# Altium PCB 10-Channel SPI Sensing Circuit.PcbDoc
Units mil, origin at the board's own origin, x right, y up, seen from the top; angles counter-clockwise.
Board outline 1023.62 x 1141.73 mil, 4 copper layers (Top Layer, GroundPlane, PowerPlane, Bottom Layer), stack 70.17 mil thick; 32 components, 41 nets, 191 pads, 54 vias.
Unrouted connection lines stored in the file: 1.
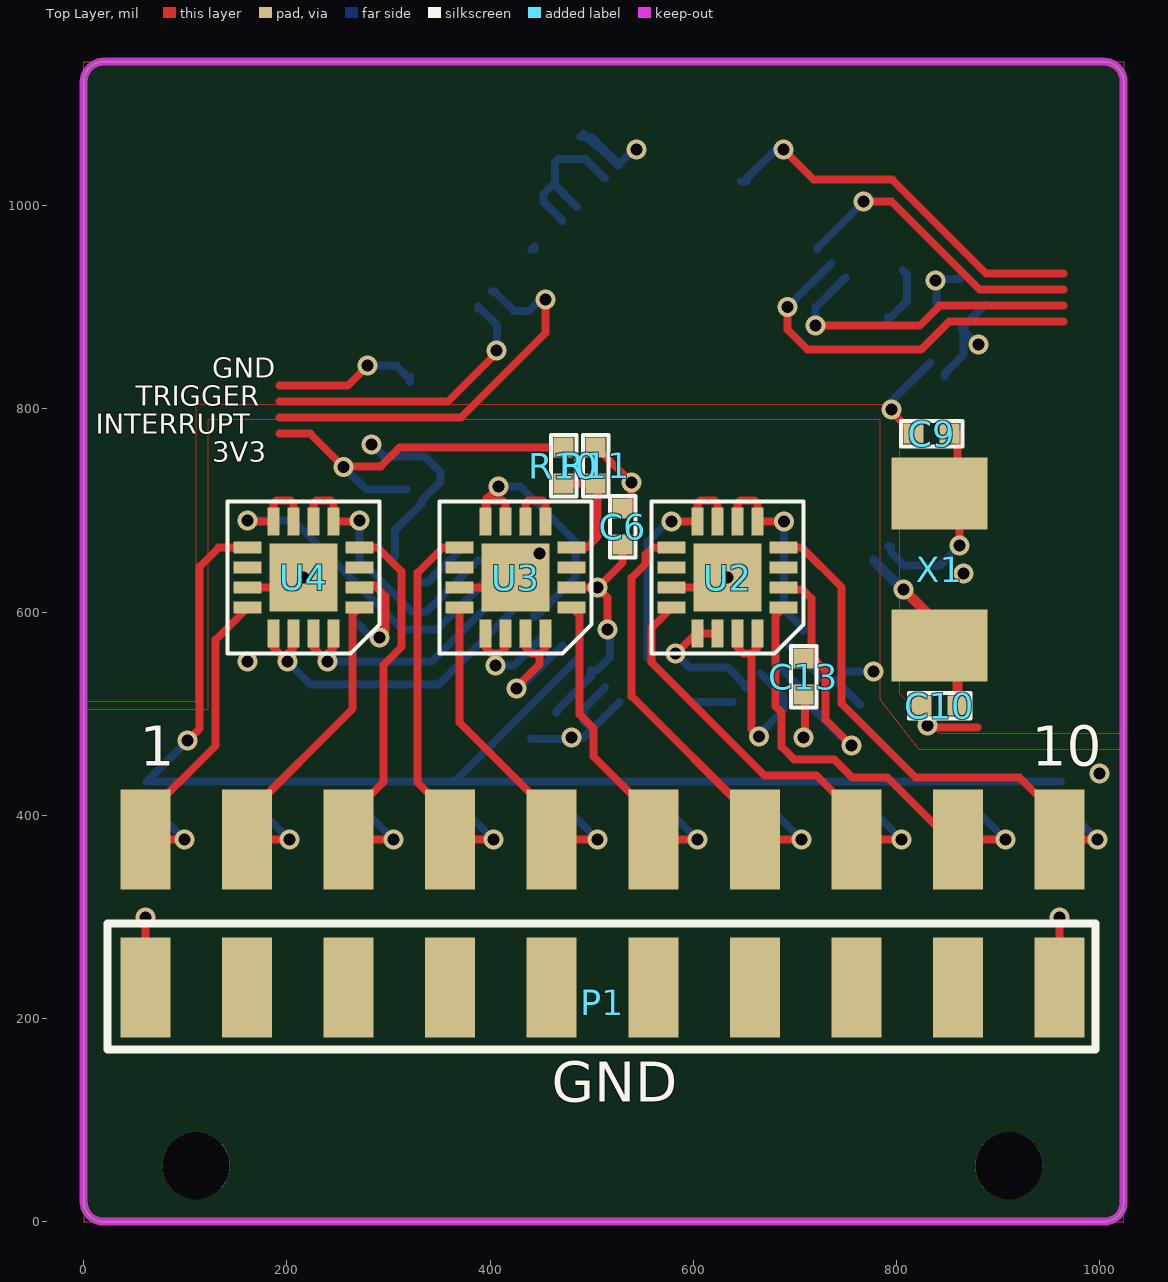
[diagram p0: Top Layer view]
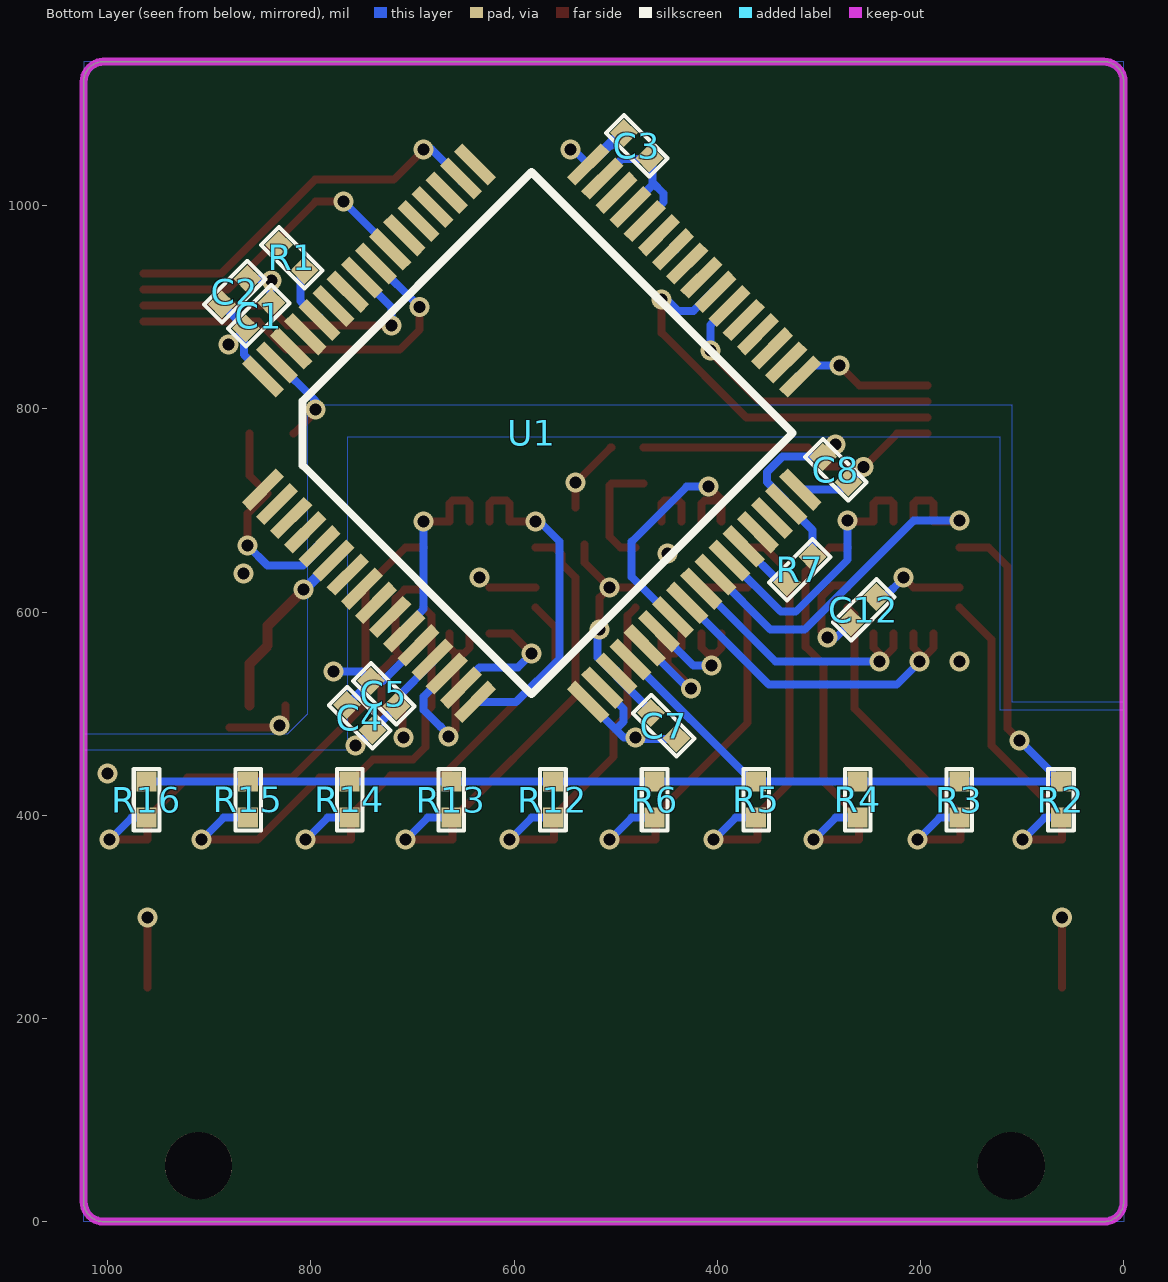
[diagram p1: Bottom Layer view, seen from below]
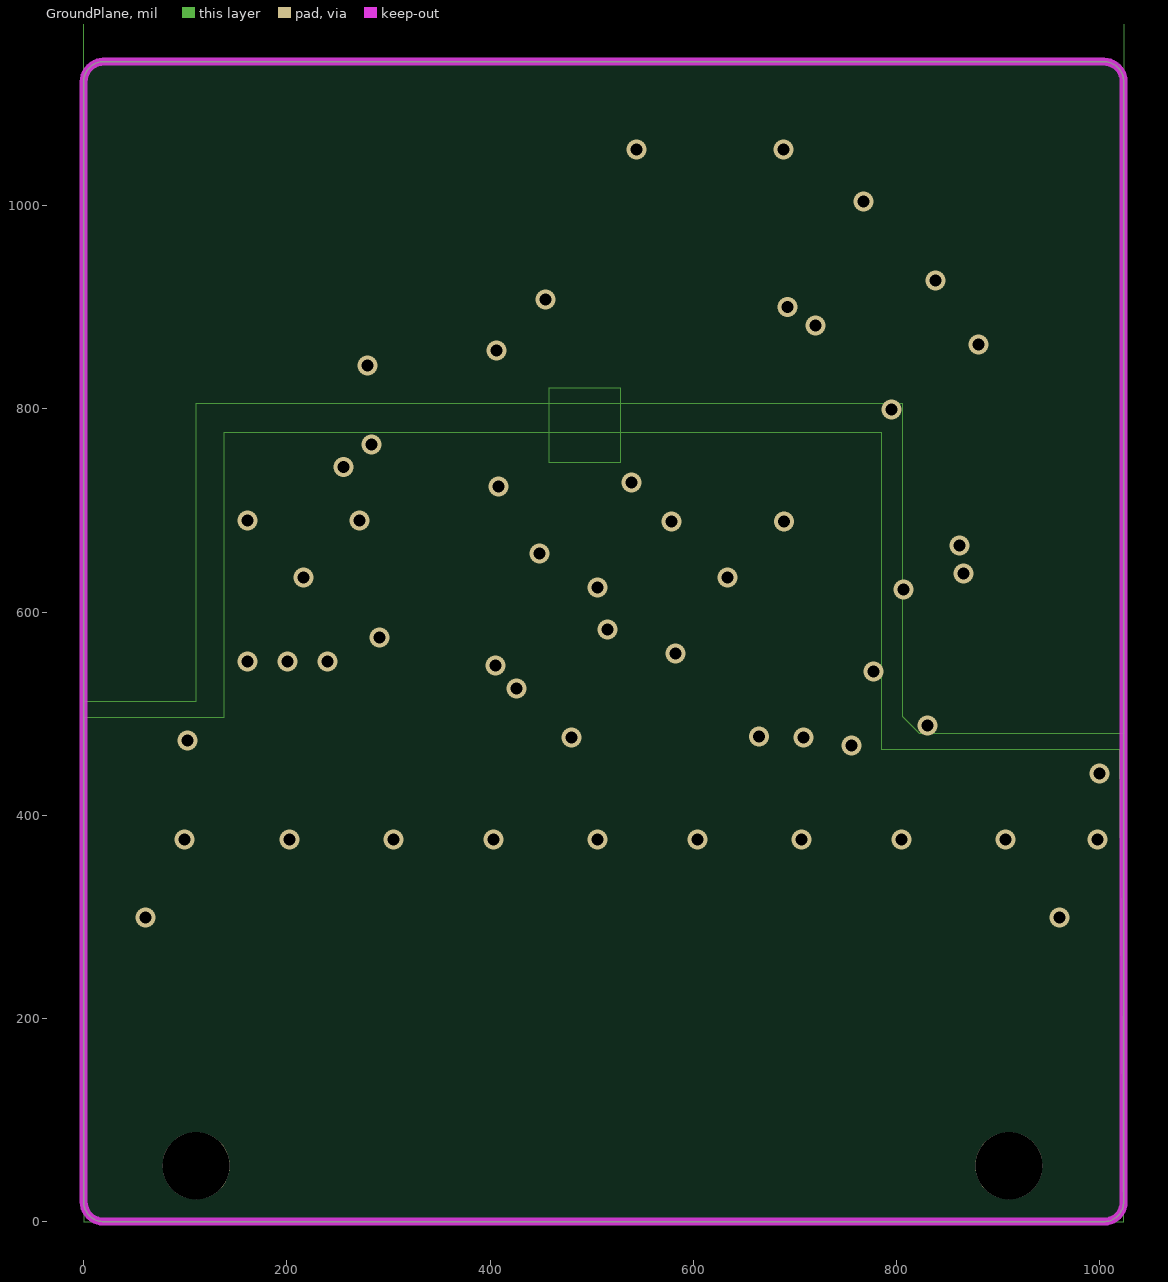
[diagram p2: GroundPlane]
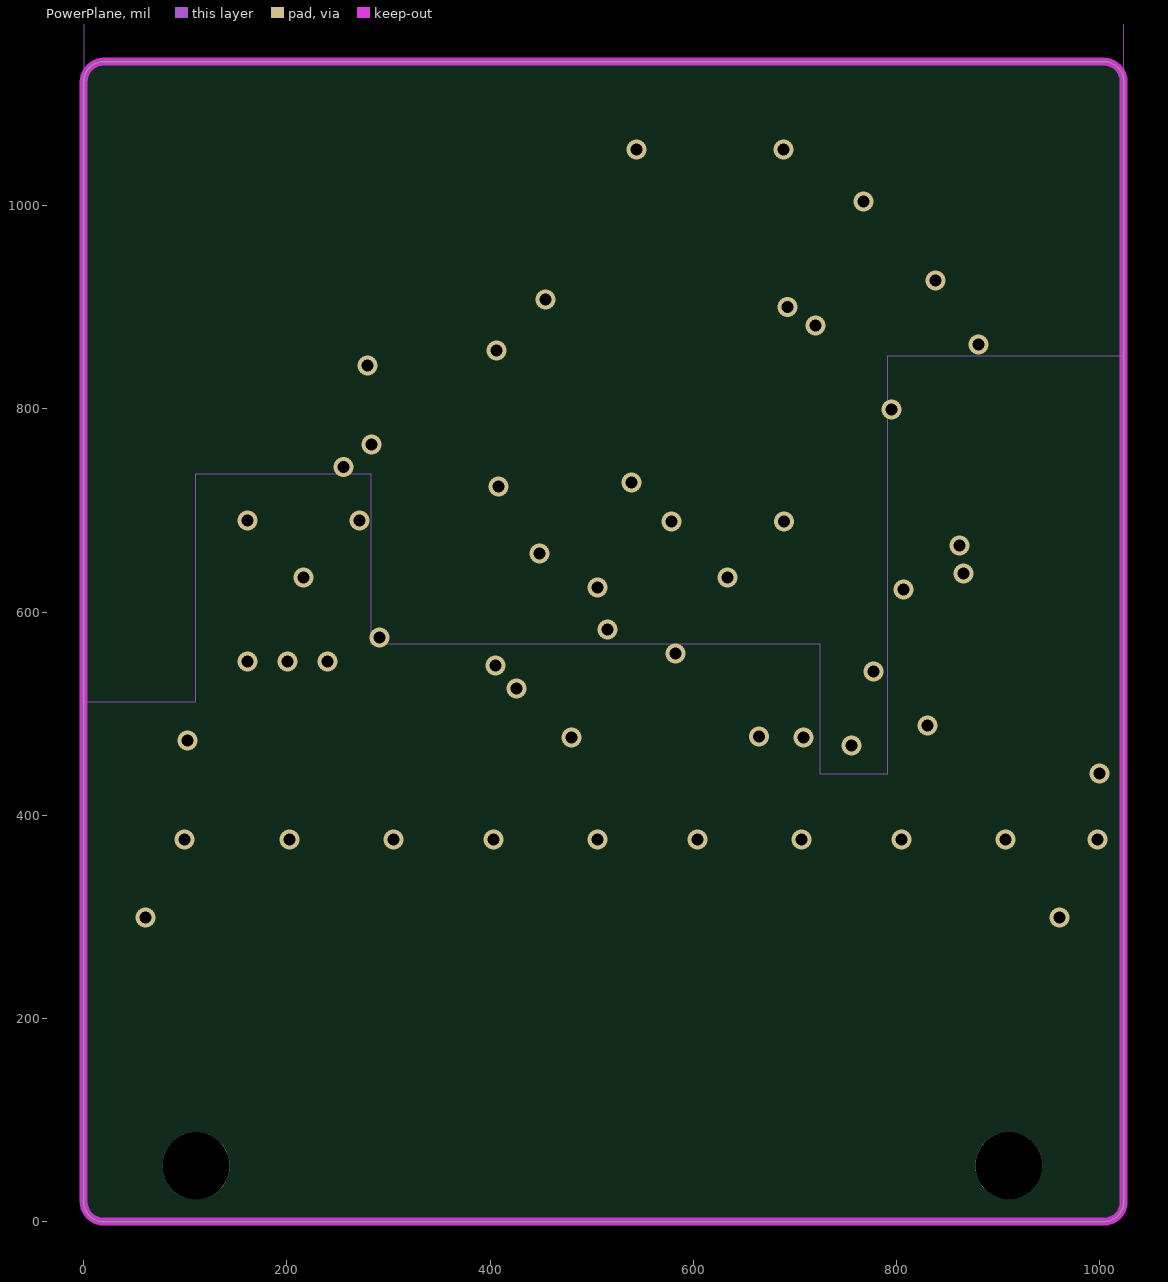
[diagram p3: PowerPlane]
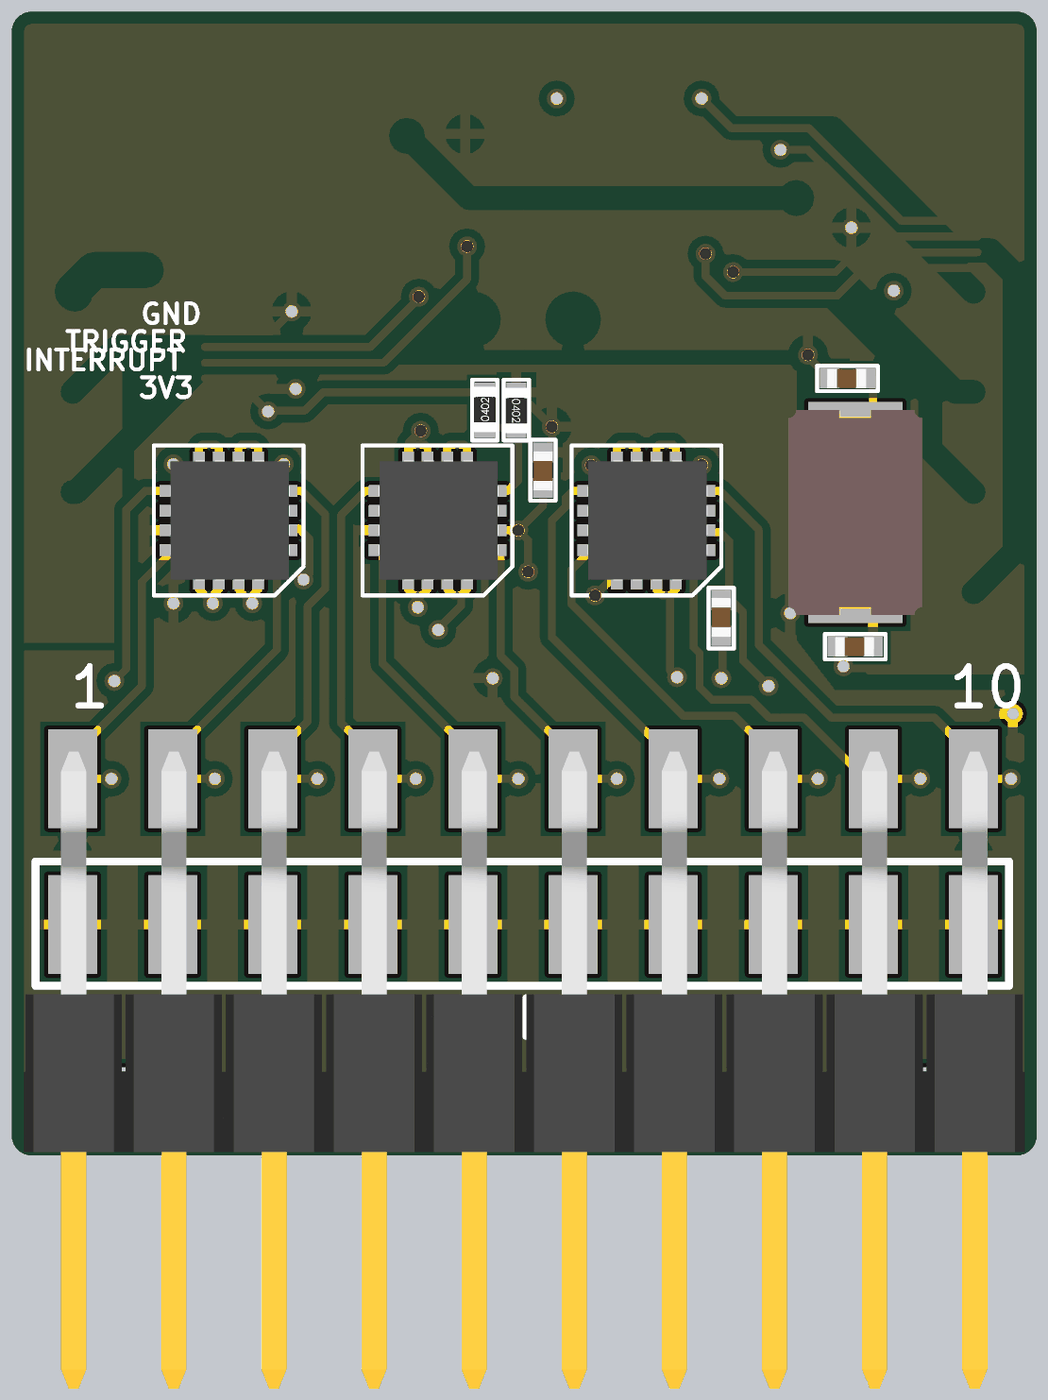
[diagram p4: 3D render of the assembled board from above, using the file's embedded part models]
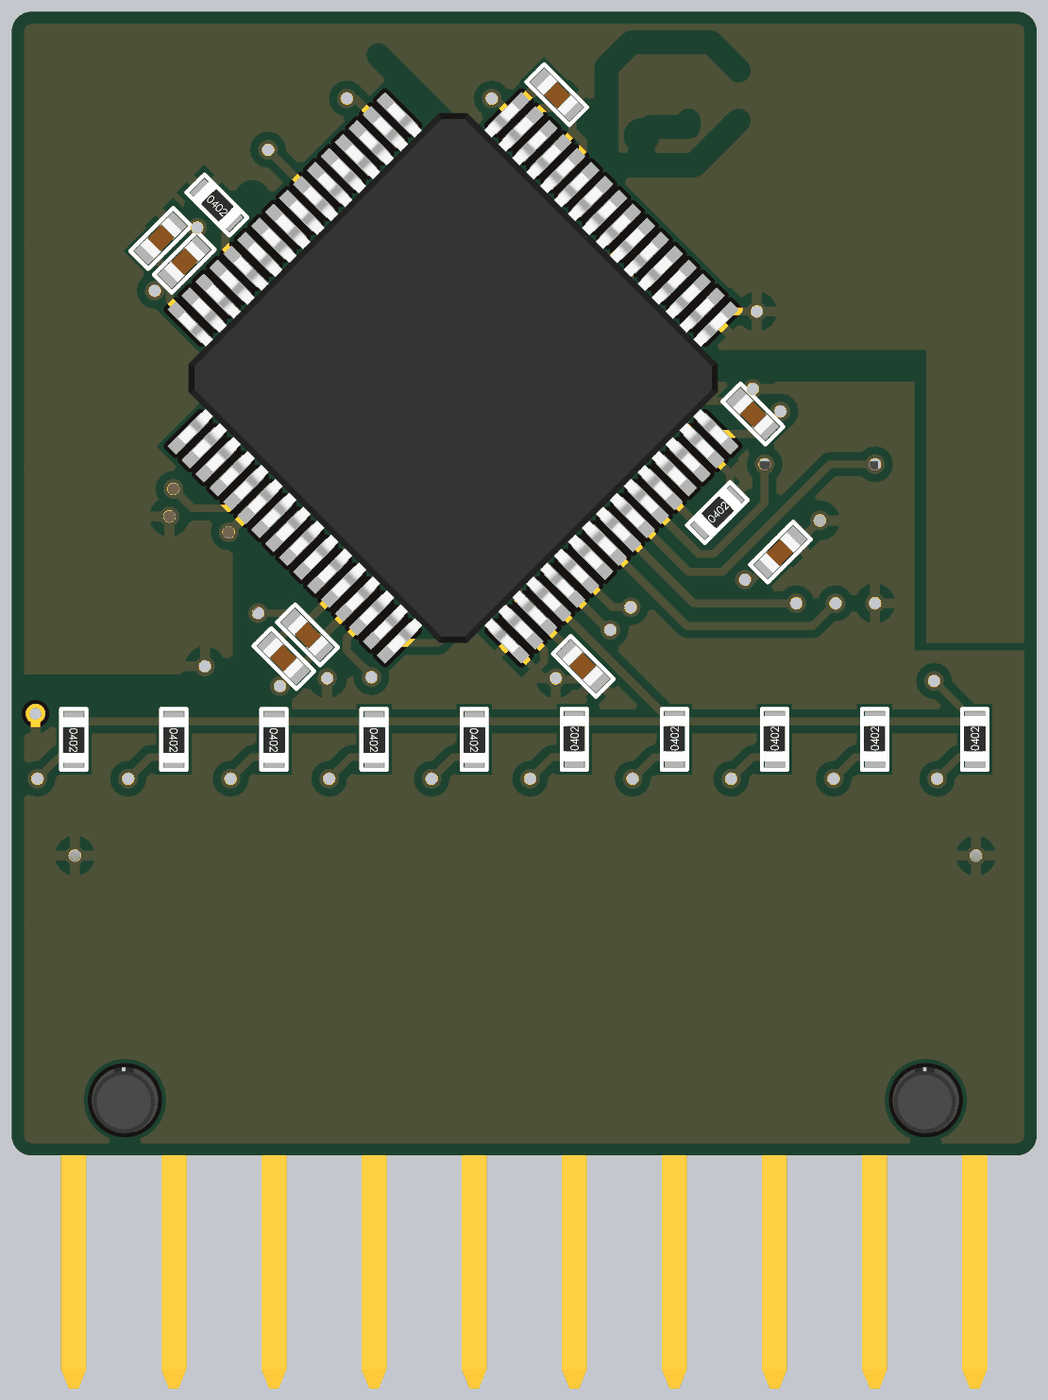
[diagram p5: 3D render of the assembled board from below, using the file's embedded part models]

## Layer stack, top to bottom
Top Solder: solder mask 0.4, Solder Resist, Dk 3.5
Top Layer: signal copper 1.4
Dielectric1: prepreg 12.6, FR-4, Dk 4.8
GroundPlane: signal copper 1.4
Dielectric3: core 39.37, FR-4, Dk 4.8
PowerPlane: signal copper 1.4
Dielectric2: prepreg 12.6, FR-4, Dk 4.8
Bottom Layer: signal copper 1.4
Bottom Solder: solder mask 0.4, Solder Resist, Dk 3.5

## Board outline
0,19.68 0,1122.05 cw(c19.68,1122.05) 19.68,1141.73 1003.94,1141.73 cw(c1003.94,1122.05) 1023.62,1122.05 1023.62,19.68 cw(c1003.94,19.68) 1003.94,0 19.68,0 cw(c19.68,19.68)

## Design rules (kind name [scope] priority, off if disabled: settings)
Clearance [All] p1: gap=7.87
MinimumSolderMaskSliver [All] p1 off: minsoldermaskwidth=10
PolygonConnect [All] p1: connectstyle=Relief reliefconductorwidth=10 reliefentries=4 polygonreliefangle="90 Angle" airgapwidth=10
RoutingVias [All] p1: holewidth=28 width=50 viastyle="Through Hole" minholewidth=11.81 minwidth=19.68 maxholewidth=28 maxwidth=50
SilkToSolderMaskClearance SilkscreenOverComponentPads [IsPad] p1 off: minsilkscreentomaskgap=10 clearancetoexposedcopper=TRUE
SolderMaskExpansion [All] p1: expansion=4
Width [All] p1: maxlimit=78.74 minlimit=7.87 preferedwidth=7.87
28 further rules are at their usual default settings.

## Components (designator, comment, footprint, x,y, rotation, side; value= is the part's Value field where it differs from the comment)
C1 "100nF" "0402 CAP" 851.38,891.73 r135 bottom
C2 "4.7uF" "0402 CAP" 875,915.35 r135 bottom
C3 "100nF" "0402 CAP" 479.33,1059.06 r225 bottom
C4 "10nF" "0402 CAP" 751.97,496.06 r45 bottom
C5 "1uF" "0402 CAP" 728.35,519.69 r225 bottom
C6 "100nF" "0402 Cap" 530.51,684.06 r270 top
C7 "100nF" "0402 CAP" 452.76,488.19 r45 bottom
C8 "100nF" "0402 CAP" 283.46,740.16 r225 bottom
C9 "36pF" "0402 Cap" 834.65,775.59 r180 top
C10 "36pF" "0402 Cap" 842.52,507.87 r180 top
C12 "100nF" "0402 Cap" 255.91,602.36 r315 bottom
C13 "100nF" "0402 Cap" 708.66,536.42 r90 top
P1 "HDR2X10 SMD Right Angle" "HDR2X10 SMD RIGHT" 960.63,230.31 r180 top
R1 "10k" "0402 RES" 818.9,948.82 r225 bottom
R2 "510k 1%" "0402 RES" 61.81,415.35 r90 bottom
R3 "510k 1%" "0402 RES" 161.81,415.35 r90 bottom
R4 "510k 1%" "0402 RES" 261.81,415.35 r90 bottom
R5 "510k 1%" "0402 RES" 361.81,415.35 r90 bottom
R6 "510k 1%" "0402 RES" 461.81,415.35 r90 bottom
R7 "10k" "0402 RES" 318.9,641.73 r135 bottom
R10 "100k" "0402 Res" 472.44,744.09 r90 top
R11 "100k" "0402 Res" 503.94,744.09 r270 top
R12 "510k 1%" "0402 Res" 561.81,415.35 r270 bottom
R13 "510k 1%" "0402 Res" 661.81,415.35 r270 bottom
R14 "510k 1%" "0402 Res" 761.81,415.35 r270 bottom
R15 "510k 1%" "0402 Res" 861.81,415.35 r270 bottom
R16 "510k 1%" "0402 Res" 961.81,415.35 r270 bottom
U1 "STM32F105R8" STM32F105R8 847.24,720.47 r135 bottom
U2 "TSV634IQ4T" QFN-16 633.86,633.86 r180 top
U3 "TSV634IQ4T" QFN-16 425.2,633.86 r180 top
U4 "TSV634IQ4T" QFN-16 216.54,633.86 r180 top
X1 "CRYSTAL 25MHZ 18PF" "CRYSTAL 24MHZ 18PF SMD" 842.52,641.73 r270 top

## Footprints (in the part's own frame and the unit in brackets; to place one, negate y for a bottom-side part, rotate by r counter-clockwise, add the part's x,y. Pads: shape width x height; smd on the part's side, far side on the other; paste and mask are expansions set on the pad)
"0402 CAP" [mm] "Source: PADS"
  rect 0.5x0.5 smd mask+0: 1(-0.45,0) 2(0.45,0)
  silkscreen extent -0.77,-0.32 0.77,0.32, body extent -0.48,-0.25 0.52,0.25, height 0.5
"0402 Cap" [mm] "Source: PADS"
  rect 0.5x0.5 smd mask+0: 1(-0.45,0) 2(0.45,0)
  silkscreen extent -0.77,-0.32 0.77,0.32, body extent -0.48,-0.25 0.52,0.25, height 0.5
"0402 RES" [mm] "Source: PADS"
  rect 0.5x0.5 smd mask+0: 1(-0.45,0) 2(0.45,0)
  silkscreen extent -0.77,-0.32 0.77,0.32, body extent -0.56,-0.27 0.59,0.28, height 0.41
"0402 Res" [mm] "Source: PADS"
  rect 0.5x0.5 smd mask+0: 1(-0.45,0) 2(0.45,0)
  silkscreen extent -0.77,-0.32 0.77,0.32, body extent -0.56,-0.27 0.59,0.28, height 0.41
"CRYSTAL 24MHZ 18PF SMD" [mm] "445C25D24M00000"
  rect 1.8x2.4 smd: 0(1.9,0) 1(-1.9,0)
  body extent -2.6,-1.7 2.6,1.7, height 1.3
"HDR2X10 SMD RIGHT" [mm]
  rect 1.25x2.5 smd: 1(0,0) 2(2.54,0) 3(5.08,0) 4(7.62,0) 5(10.16,0) 6(12.7,0) 7(15.24,0) 8(17.78,0) 9(20.32,0) 10(22.86,0) 11(0,-3.7) 12(2.54,-3.7) 13(5.08,-3.7) 14(7.62,-3.7) 15(10.16,-3.7) 16(12.7,-3.7) 17(15.24,-3.7) 18(17.78,-3.7) 19(20.32,-3.7) 20(22.86,-3.7)
  round 1.68 hole 1.68 unplated: ""(1.27,4.45) ""(21.59,4.45)
  body extent -1.3,-4.39 24.1,11.77, height 5.04
QFN-16 [mm]
  rect 0.7x0.3 smd: 1(-1.4,0.75) 2(-1.4,0.25) 3(-1.4,-0.25) 4(-1.4,-0.75) 9(1.4,-0.75) 10(1.4,-0.25) 11(1.4,0.25) 12(1.4,0.75)
  rect 0.3x0.7 smd: 5(-0.75,-1.4) 6(-0.25,-1.4) 7(0.25,-1.4) 8(0.75,-1.4) 13(0.75,1.4) 14(0.25,1.4) 15(-0.25,1.4) 16(-0.75,1.4)
  rect 1.7x1.7 smd: 17(0,0)
  silkscreen extent -1.9,-1.9 1.9,1.9, body extent -1.55,-1.52 1.49,1.52, height 0.9
STM32F105R8 [mm] "STM32F10x 10mm x 10mm package"
  rect 1.2x0.3 smd: 1(0,0) 2(0,-0.5) 3(0,-1) 4(0,-1.5) 5(0,-2) 6(0,-2.5) 7(0,-3) 8(0,-3.5) 9(0,-4) 10(0,-4.5) 11(0,-5) 12(0,-5.5) 13(0,-6) 14(0,-6.5) 15(0,-7) 16(0,-7.5) 33(11.5,-7.5) 34(11.5,-7) 35(11.5,-6.5) 36(11.5,-6) 37(11.5,-5.5) 38(11.5,-5) 39(11.5,-4.5) 40(11.5,-4) 41(11.5,-3.5) 42(11.5,-3) 43(11.5,-2.5) 44(11.5,-2) 45(11.5,-1.5) 46(11.5,-1) 47(11.5,-0.5) 48(11.5,0)
  rect 0.3x1.2 smd: 17(2,-9.5) 18(2.5,-9.5) 19(3,-9.5) 20(3.5,-9.5) 21(4,-9.5) 22(4.5,-9.5) 23(5,-9.5) 24(5.5,-9.5) 25(6,-9.5) 26(6.5,-9.5) 27(7,-9.5) 28(7.5,-9.5) 29(8,-9.5) 30(8.5,-9.5) 31(9,-9.5) 32(9.5,-9.5) 49(9.5,2) 50(9,2) 51(8.5,2) 52(8,2) 53(7.5,2) 54(7,2) 55(6.5,2) 56(6,2) 57(5.5,2) 58(5,2) 59(4.5,2) 60(4,2) 61(3.5,2) 62(3,2) 63(2.5,2) 64(2,2)
  silkscreen extent 1.13,-8.36 10.36,0.87, body extent -0.25,-9.75 11.75,2.25, height 1.6

## Part data
C1 C3 C6 C7 C8 C12 C13: library part "Cap 0402 100nF 10%", "Capacitor"
C2: library part "Cap 0402 4.7uF 10%", "Capacitor"
C4: library part "Cap 0402 10nF 10%", "Capacitor"
C5: library part "Cap 0402 1uF 5%", "Capacitor"
C9 C10: library part "Cap 36pF 0402", "Capacitor"
P1: library part "Header 2x10 SMD R/A 2.54mm", "Header"
R1 R7: library part "Res 0402 10k 5%", "Resistor"
R2 R3 R4 R5 R6 R12 R13 R14 R15 R16: library part "Res 0402 510k 1%", "Resistor"
R10 R11: library part "Res 0402 100k 5%", "Resistor"
U1: "Microcontroller"
U2 U3 U4: library part "Quad Opamp TSV634IQ4T", "Quad Opamp"
X1: library part "CRYSTAL 25MHZ 18PF SMD", "445C25D24M00000"

## Via types
v1: diameter 19.68, hole 11.81, Top Layer to Bottom Layer, tented both sides, 53 vias
v2: diameter 19.68, hole 11.81, Top Layer to Bottom Layer, 1 vias

## Nets (pads, with @x,y where several pads share a name; then routed paths per layer and width w, separated by ;. In a path a pad name is that pad's centre, name@x,y a point inside that pad or via, vN(x,y) a via of type N, cw(c..) or ccw(c..) an arc to the next point about the centre after c; other vN are vias at no path point)
ADC_CH_0: U1.26 U4.7 U4.8 | length 389.5
  Top Layer w7.87: v1(161.42,689.96) v1@161.42,692.91 ; v1@165.35,688.98 U4.8 187.01,706.69 189.96,709.65 203.74,709.65 206.69,706.69 U4.7
  Bottom Layer w7.87: v1(161.42,689.96) 206.8,689.96 314.08,582.68 347.54,582.68 U1.26
ADC_CH_1: U1.24 U4.13 U4.14 | length 327
  Top Layer w7.87: U4.13 187.01,564.96 v1(200.79,551.18) ; v1@200.79,559.06 206.69,564.96 U4.14
  Bottom Layer w7.87: v1(200.79,551.18) 223.42,528.54 349.09,528.54 U1.24
ADC_CH_2: U1.25 U4.15 U4.16 | length 258
  Top Layer w7.87: U4.15 226.38,564.96 v1(240.16,551.18) ; v1@240.16,559.06 246.06,564.96 U4.16
  Bottom Layer w7.87: v1(240.16,551.18) 342.5,551.18 U1.25@413.37,622.06
ADC_CH_3: U1.27 U4.5 U4.6 | length 276.4
  Top Layer w7.87: U4.6 226.38,706.69 229.33,709.65 243.11,709.65 246.06,706.69 U4.5 v1@263.78,688.98 ; v1@267.72,688.98 268.7,689.96 v1(271.65,689.96)
  Bottom Layer w7.87: v1(271.65,689.96) 271.65,651.55 322.81,600.39 337.42,600.39 U1.27
ADC_CH_4: U1.23 U3.7 U3.8 | length 288.1
  Top Layer w7.87: v1(408.46,723.43) 396.65,711.61 396.65,689.96 U3.8 395.67,706.69 398.62,709.65 412.4,709.65 415.35,706.69 U3.7
  Bottom Layer w7.87: v1(408.46,723.43) 430.12,723.43 484.25,669.29 484.25,634.48 446.37,596.59 443.58,596.59 U1.23
ADC_CH_5: U1.22 U3.13 U3.14 | length 126.1
  Top Layer w7.87: U3.13 395.67,564.96 401.57,559.06 409.45,559.06 415.35,564.96 U3.14 ; v1(405.51,547.24) v1@405.51,555.12
  Bottom Layer w7.87: v1(405.51,547.24) 423.47,547.24 U1.22
ADC_CH_6: U1.21 U3.15 U3.16 | length 161.3
  Top Layer w7.87: v1(425.88,524.61) 425.2,525.29 448.82,548.92 448.82,559.06 ; U3.15 435.04,564.96 440.94,559.06 448.82,559.06 ; U3.16 454.72,564.96 448.82,559.06
  Bottom Layer w7.87: v1(425.88,524.61) 428.67,524.61 U1.21 U1.21@471.42,565.97
ADC_CH_7: U1.16 U2.7 U2.8 | length 334
  Top Layer w7.87: v1(578.74,688.98) 582.68,692.91 586.61,688.98 U2.8 604.33,706.69 607.28,709.65 621.06,709.65 624.02,706.69 U2.7
  Bottom Layer w7.87: v1(578.74,688.98) 574.8,688.98 555.12,669.29 555.12,554.6 598.04,511.68 U1.16
ADC_CH_8: U1.15 U2.13 U2.14 | length 134.7
  Top Layer w7.87: v1(582.68,559.06) 602.36,578.74 U2.13 U2.14
  Bottom Layer w7.87: v1(582.68,559.06) 596.38,545.36 634.01,545.36 650.98,528.38 650.98,525.6 U1.15
ADC_CH_9: U1.14 U2.15 U2.16 | length 218.6
  Top Layer w7.87: U2.15 643.7,564.96 649.61,559.06 657.48,559.06 ; U2.16 663.39,564.96 657.48,559.06 ; v1(664.45,477.42) 657.48,484.38 657.48,559.06
  Bottom Layer w7.87: v1(664.45,477.42) 664.45,479.45 672.2,487.2 672.32,487.09 688.98,503.74 688.98,516.84 U1.14
ADC_CH_10: U1.11 U2.5 U2.6 | length 191.1
  Top Layer w7.87: U2.6 643.7,706.69 646.65,709.65 660.43,709.65 663.39,706.69 U2.5 v1@681.1,688.98
  Bottom Layer w7.87: v1(689.28,689.28) 689.28,602.83 708.05,584.06 U1.11
BOOT0: R1.2 U1.60 | length 59.8
  Bottom Layer w7.87: U1.60 791.57,890.29 794.35,890.29 810.34,906.28 810.34,932.32 R1.2
DAC_OUT_1: R2.2 R3.2 R4.2 R5.2 R6.2 R12.1 R13.1 R14.1 R15.1 R16.1 U1.20 U4.9 | length 1355.4
  Top Layer w7.87: v1(102.36,473.62) 114.17,485.43 114.17,644.69 132.87,663.39 U4.9
  Bottom Layer w7.87: v1(102.36,473.62) R2.2 R3.2 R4.2 R5.2 ; U1.20 364.97,433.07 R6.2 R12.1 R13.1 R14.1 R15.1 R16.1
GND: C1.2 C2.2 C3.2 C4.2 C5.1 C6.1 C7.1 C8.1 C9.2 C10.2 C12.1 C13.1 P1.1 P1.2 P1.3 P1.4 P1.5 P1.6 P1.7 P1.8 P1.9 P1.10 R1.1 R7.2 R11.1 U1.12 U1.17 U1.18 U1.31 U1.33 U1.44 U1.45 U1.47 U1.63 U2.11 U2.17 U3.11 U3.17 U4.11 U4.17 | length 1438.9
  Top Layer w7.87: P1.10 v1(60.63,299.21) ; U4.11 206.69,624.02 v1(216.54,633.86) ; 192.91,822.83 259.84,822.83 v1(279.53,842.52) ; U3.11 415.35,624.02 U3.17 ; R11.1 504.89,761.81 v1(539.37,727.33) C6.1@539.37,702.76 ; U2.11 U2.17@624.02,624.02 ; C13.1 709.72,517.64 v1@709.72,483.3 ; v1(795.28,799.21) 795.28,797.24 C9.2 ; C10.2 824.8,494.09 v1(830.71,488.19) 832.68,486.22 879.92,486.22 ; P1.1 v1(960.63,299.21)
  Bottom Layer w7.87: v1(216.54,633.86) 235.5,614.89 C12.1 ; v1(279.53,842.52) 307.61,842.52 U1.33 321.09,831.83 U1.33@321.09,826.26 ; v1(283.46,765.21) C8.1 295.99,753.16 335.73,753.16 351,737.89 351,728.11 332.23,709.34 U1.31 306.37,680.7 R7.2 ; C7.1 440.9,474.99 v1@477.49,474.99 ; C3.2@463.85,1042.59 463.85,1022.91 ; C3.2 466.8,1045.85 494.03,1045.85 U1.47 ; U1.44 452.76,1003.61 452.76,1011.81 463.85,1022.91 ; U1.45 463.85,1020.35 463.85,1022.91 ; U1.18 492.13,504.55 492.13,492.46 500,484.58 ; U1.17 500,484.58 ; U1.12@695.55,567.36 U1.12 729.28,532.21 C5.1 ; C4.2 C5.1 ; v1(777.56,541.34) 750,541.34 C5.1 ; v1(795.28,799.21) 795.28,807.7 U1.63 ; C1.2@839.57,904.98 v1@839.57,927.17 ; v1@840.28,927.88 C2.2 ; v1@477.49,474.99 478.88,476.38 v1(480.31,476.38) ; v1@477.49,474.99 478.92,474.99 v1(480.31,476.38) ; v1(480.31,476.38) 491.79,476.38 500,484.58
  other v1: 708.66,476.38 161.42,551.18 633.86,633.86 866.14,637.8 448.82,657.48 838.58,926.18
  other v2: 1000,440.94
INTERRUPT: U1.39 | length 394.2
  Top Layer w7.87: 192.91,791.34 371.17,791.34 454.72,874.88 v1(454.72,907.48)
  Bottom Layer w7.87: U1.39 404.61,915.34 423.38,896.57 438.49,896.57 449.4,907.48 v1(454.72,907.48)
NetR7_1: R7.1 U1.28 | length 57.3
  Bottom Layer w7.87: R7.1 338.39,629.2 U1.28
NetR10_1: R10.1 R11.2 U3.4 | length 114.6
  Top Layer w7.87: R10.1 R11.2 505.91,724.41 505.91,674.21 495.08,663.39 U3.4
NetU3_5: U3.5 U3.6 | length 57.6
  Top Layer w7.87: U3.6 435.04,706.69 437.99,709.65 451.77,709.65 454.72,706.69 U3.5
OSC_IN: C9.1 U1.5 X1.1 | length 215.4
  Top Layer w7.87: C9.1@860.24,775.59 860.24,734.25 X1.1 862.2,696.85 v1(862.2,665.35)
  Bottom Layer w7.87: U1.5 794.35,664.79 794.35,659.23 807.55,646.02 842.87,646.02 v1(862.2,665.35)
OSC_OUT: C10.1 U1.6 X1.0 | length 177.6
  Top Layer w9.84: v1(807.09,622.05) 842.52,586.61 X1.0 860.24,549.21 C10.1
  Bottom Layer w9.84: U1.6 806.48,622.05 v1(807.09,622.05)
RESET: U1.7
SENSE_1: P1.20 R2.1 U4.12 | length 355.4
  Top Layer w7.87: v1(99.41,375.98) P1.20 60.63,399.21 129.92,468.5 129.92,572.83 U4.12
  Bottom Layer w7.87: R2.1 77.76,397.64 v1(99.41,375.98)
SENSE_2: P1.19 R3.1 U4.1 | length 366.4
  Top Layer w7.87: v1(202.76,375.98) P1.19 160.63,400.79 264.76,504.92 264.76,597.44 U4.1
  Bottom Layer w7.87: R3.1 181.1,397.64 v1(202.76,375.98)
SENSE_3: P1.18 R4.1 U4.4 | length 433.4
  Top Layer w7.87: U4.4 289.37,663.39 312.99,639.76 312.99,565.83 295.28,548.12 295.28,433.07 260.63,398.43 P1.18 v1(305.12,375.98)
  Bottom Layer w7.87: R4.1 283.46,397.64 v1(305.12,375.98)
SENSE_4: P1.17 R5.1 U3.9 | length 421.2
  Top Layer w7.87: U3.9 353.35,663.39 328.74,638.78 328.74,432.09 360.63,400.2 P1.17 v1(403.54,375.98)
  Bottom Layer w7.87: R5.1 381.89,397.64 v1(403.54,375.98)
SENSE_5: P1.16 R6.1 U3.12 | length 364.2
  Top Layer w7.87: U3.12 370.08,491.14 460.63,400.59 P1.16 v1(505.91,375.98)
  Bottom Layer w7.87: R6.1 484.25,397.64 v1(505.91,375.98)
SENSE_6: P1.15 R12.2 U3.1 | length 356.8
  Top Layer w7.87: U3.1 488.19,596.46 488.19,499.12 501.97,485.34 501.97,457.68 560.63,399.02 P1.15 v1(604.33,375.98)
  Bottom Layer w7.87: R12.2 582.68,397.64 v1(604.33,375.98)
SENSE_7: P1.14 R13.2 U2.9 | length 464.8
  Top Layer w7.87: U2.9 560.04,663.39 553.15,656.5 553.15,647.64 539.37,633.86 539.37,517.1 660.63,395.84 P1.14 v1(706.69,375.98)
  Bottom Layer w7.87: R13.2 685.04,397.64 v1(706.69,375.98)
SENSE_8: P1.13 R14.2 U2.12 | length 446.7
  Top Layer w7.87: U2.12 559.06,584.65 559.06,550.2 670.28,438.98 721.46,438.98 760.63,399.8 P1.13 v1(805.12,375.98)
  Bottom Layer w7.87: R14.2 783.46,397.64 v1(805.12,375.98)
SENSE_9: P1.12 R15.2 U2.1 | length 455.6
  Top Layer w7.87: U2.1 681.1,596.46 681.1,507.13 687.01,501.23 687.01,467.41 699.69,454.72 739.06,454.72 756.78,437.01 791.34,437.01 852.36,375.98 P1.12 v1(907.48,375.98)
  Bottom Layer w7.87: R15.2 885.83,397.64 v1(907.48,375.98)
SENSE_10: P1.11 R16.2 U2.4 | length 554.5
  Top Layer w7.87: U2.4@689.96,662.4 U2.4 707.07,663.39 746.06,624.39 746.06,509.84 818.9,437.01 921.26,437.01 960.63,397.64 P1.11 v1(998.03,375.98)
  Bottom Layer w7.87: R16.2 976.38,397.64 v1(998.03,375.98)
SPI_CLK: U1.55 | length 298.5
  Top Layer w7.87: v1(767.72,1003.94) 795.28,1003.94 881.89,917.32 964.57,917.32
  Bottom Layer w7.87: U1.55 721.97,958.19 v1(767.72,1003.94)
SPI_MISO: U1.56 | length 374.3
  Top Layer w7.87: v1(692.91,900.21) 692.91,877.95 712.6,858.27 824.19,858.27 851.74,885.83 964.57,885.83
  Bottom Layer w7.87: v1(692.91,900.21) U1.56
SPI_MOSI: U1.57 | length 311.8
  Top Layer w7.87: v1(720.47,881.89) 822.83,881.89 842.52,901.57 964.57,901.57
  Bottom Layer w7.87: v1(720.47,881.89) 720.47,899.93 U1.57
SPI_NSS: U1.50 | length 382.9
  Top Layer w7.87: v1(688.98,1055.12) 718.5,1025.59 795.89,1025.59 888.41,933.07 964.57,933.07
  Bottom Layer w7.87: U1.50@646.8,1023.92 652.37,1023.92 U1.50 680.79,1055.12 v1(688.98,1055.12)
SWCLK: U1.49
SWDIO: U1.46
TRIGGER: U1.38 | length 295.8
  Top Layer w7.87: 192.91,807.09 358.27,807.09 408.46,857.28 v1(406.5,857.28) v1@406.5,860.21
  Bottom Layer w7.87: U1.38@387.9,898.82 U1.38 406.67,882.65 406.67,857.46 v1(406.5,857.28)
USART1_RX: U1.43
USART1_TX: U1.42 | length 5.6
  Bottom Layer w7.87: U1.42@440.8,957.1 U1.42 U1.42@443.58,959.89
VCC: C1.1 C2.1 C3.1 C4.1 C5.2 C6.2 C7.2 C8.2 C12.2 C13.2 R10.2 U1.13 U1.19 U1.32 U1.48 U1.64 U2.2 U3.2 U4.2 | length 1265.2
  Top Layer w7.87: 192.91,775.59 222.98,775.59 v1(255.91,742.66) 256.8,743.56 292.43,743.56 310.69,761.81 R10.2 ; U4.2 273.62,625.98 286.39,625.98 297.24,615.13 297.24,580.71 v1(291.34,574.8) ; U3.2 v1(505.91,624.02) ; v1(515.75,582.68) 515.75,614.17 v1(505.91,624.02) ; C6.2 530.51,648.62 v1(505.91,624.02) ; U2.2 690.95,622.05 707.65,622.05 716.54,613.16 716.54,562.01 C13.2 718.5,554.13 730.31,542.32 730.31,494.09 v1(755.91,468.5)
  Bottom Layer w7.87: v1(255.91,742.66) C8.2 278.09,720.47 U1.32 ; C12.2 283.47,574.8 v1(291.34,574.8) ; C7.2 465.28,502.76 499.26,536.74 499.26,542.3 504.83,542.3 518.03,555.51 518.03,580.4 v1(515.75,582.68) ; U1.48 500.07,1067.65 488.91,1067.65 492.13,1070.87 503.6,1059.39 505.54,1059.39 525.56,1039.37 541.31,1055.12 v1(544.28,1055.12) ; U1.13 680.21,550.66 715.82,515.05 C5.2 C4.1 754.47,468.5 v1(755.91,468.5) ; U1.64 847.24,834.61 866.01,853.38 C1.1@866.01,877.1 ; v1(880.91,863.19) 879.92,863.19 C1.1@866.01,877.1 ; C2.1 C1.1 C1.1@866.01,877.1
pads on no net: P1. U1.1 U1.2 U1.3 U1.4 U1.8 U1.9 U1.10 U1.29 U1.30 U1.34 U1.35 U1.36 U1.37 U1.40 U1.41 U1.51 U1.52 U1.53 U1.54 U1.58 U1.59 U1.61 U1.62 U2.3 U2.10 U3.3 U3.10 U4.3 U4.10

## Polygon pours and split planes (outlines as drawn)
GND on Top Layer "DigitalGNDTop" (solid, remove dead copper, shelved, pour order 1004): 1023.62,1141.73 1023.62,480.31 842.52,480.31 803.15,519.68 803.15,804.13 110.24,804.13 110.24,511.81 0,511.81 0,1141.73
GND on Top Layer "TopAnalogGND" (solid, remove dead copper, shelved, pour order 1012): 0,0 1023.62,0 1023.62,464.57 822.27,464.57 784.21,513.94 784.21,789.53 122.05,789.53 122.05,503.94 0,503.94
GND on Bottom Layer "DigitalGNDBottom" (solid, remove dead copper, shelved, pour order 1010): 1023.62,1141.73 1023.62,480.31 822.83,480.31 803.15,500 803.15,804.13 110.24,804.13 110.24,511.81 0,511.81 0,1141.73
GND on Bottom Layer "Top Layer-No Net" (solid, remove dead copper, shelved, pour order 1001): 0,0 1023.62,0 1023.62,464.57 763.78,464.57 763.78,772.64 122.05,772.64 122.05,503.94 0,503.94
GND on GroundPlane "DigitalGNDInternal" (solid, remove dead copper, shelved, pour order 1006): 1023.62,1220.47 1023.62,480.31 822.83,480.31 806.1,497.05 806.1,805.12 110.24,805.12 110.24,511.81 0,511.81 0,1220.47
GND on GroundPlane "Top Layer-No Net" (solid, remove dead copper, shelved, pour order 1002): 0,0 1023.62,0 1019.47,464.57 785.43,464.57 785.43,776.57 137.8,776.57 137.8,496.06 0,496.06
GND on GroundPlane "GNDConnector" (solid, shelved, pour order 1008): 457.68,820.37 457.68,747.54 528.54,747.54 528.54,820.37
VCC on PowerPlane "Top Layer-No Net" (solid, remove dead copper, shelved, pour order 1003): 0,511.81 110.24,511.81 110.24,736.22 282.48,736.22 282.48,568.9 724.41,568.9 724.41,440.94 791.34,440.94 791.34,852.36 1023.62,852.36 1023.62,1220.47 0,1220.47

## Keep-outs
Keep-Out Layer:
  the board outline again, w7.87

## Silkscreen, mask and mechanical layers (free items; w line width, h text height)
Top Overlay:
  lines w7.87: 23.62,169.29 996.06,169.29 996.06,293.31 23.62,293.31 23.62,169.29
  text "StretchSense" at 299.21,1275.59 h106.3
  text "GND" at 126.6,830.71 h19.68
  text "TRIGGER" at 51.17,803.15 h19.68
  text "INTERRUPT" at 11.81,775.59 h19.68
  text "3V3" at 126.6,748.03 h19.68
  text "1" at 55.12,448.82 h39.37
  text "10" at 933.07,448.82 h39.37
  text "GND" at 460.63,118.11 h39.37